# Altium PCB RF-learn-command-1relay-220V-capacitor.PcbDoc
Units mm, origin at the board's own origin, x right, y up, seen from the top; angles counter-clockwise.
Board outline 65 x 27.5 mm, 2 copper layers (Top Layer, Bottom Layer); 33 components, 27 nets, 95 pads, 24 vias.
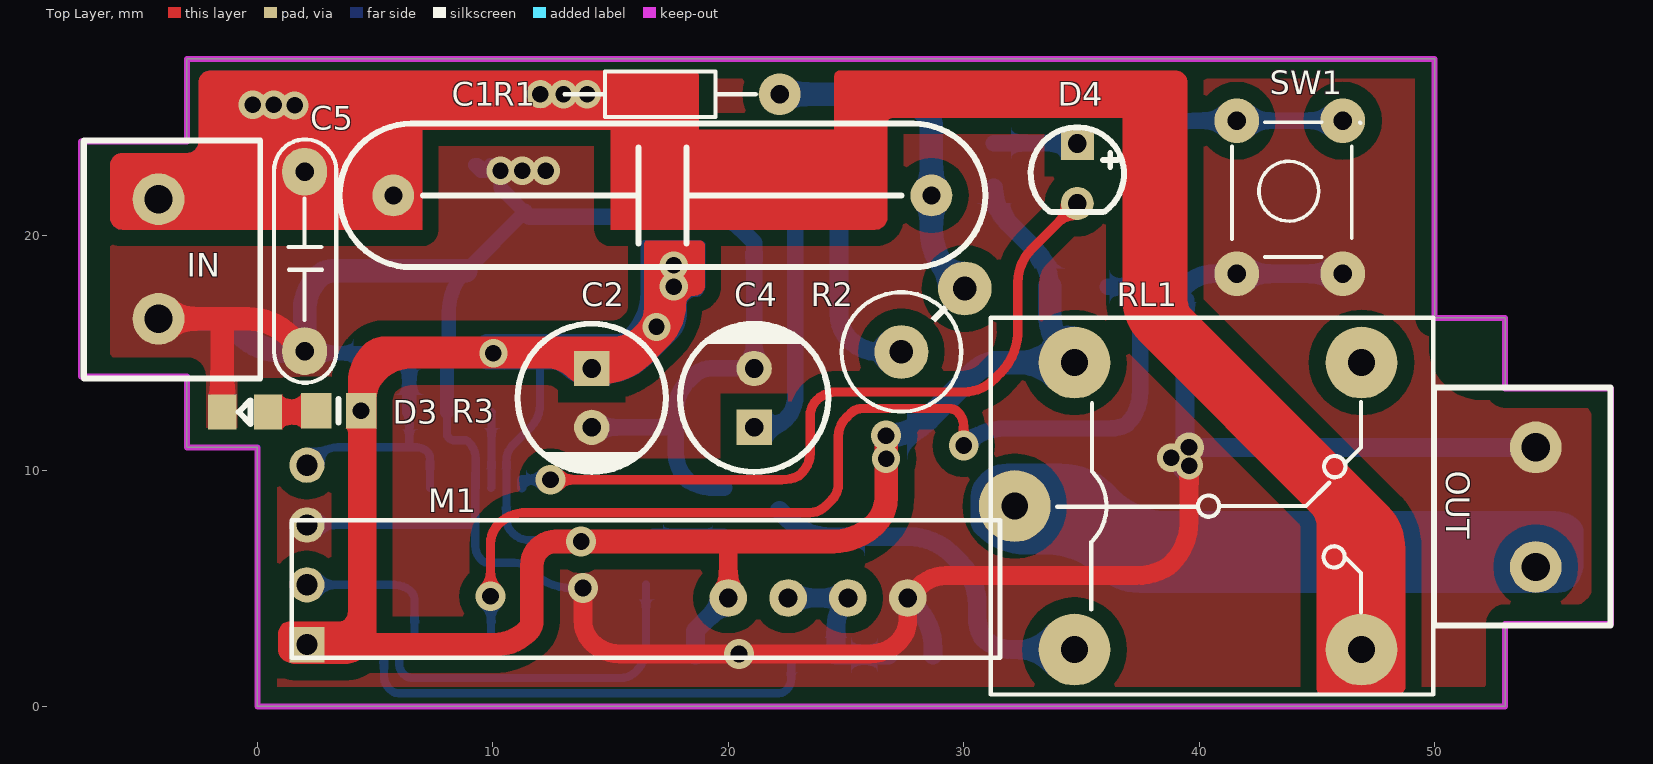
[diagram p0: Top Layer view]
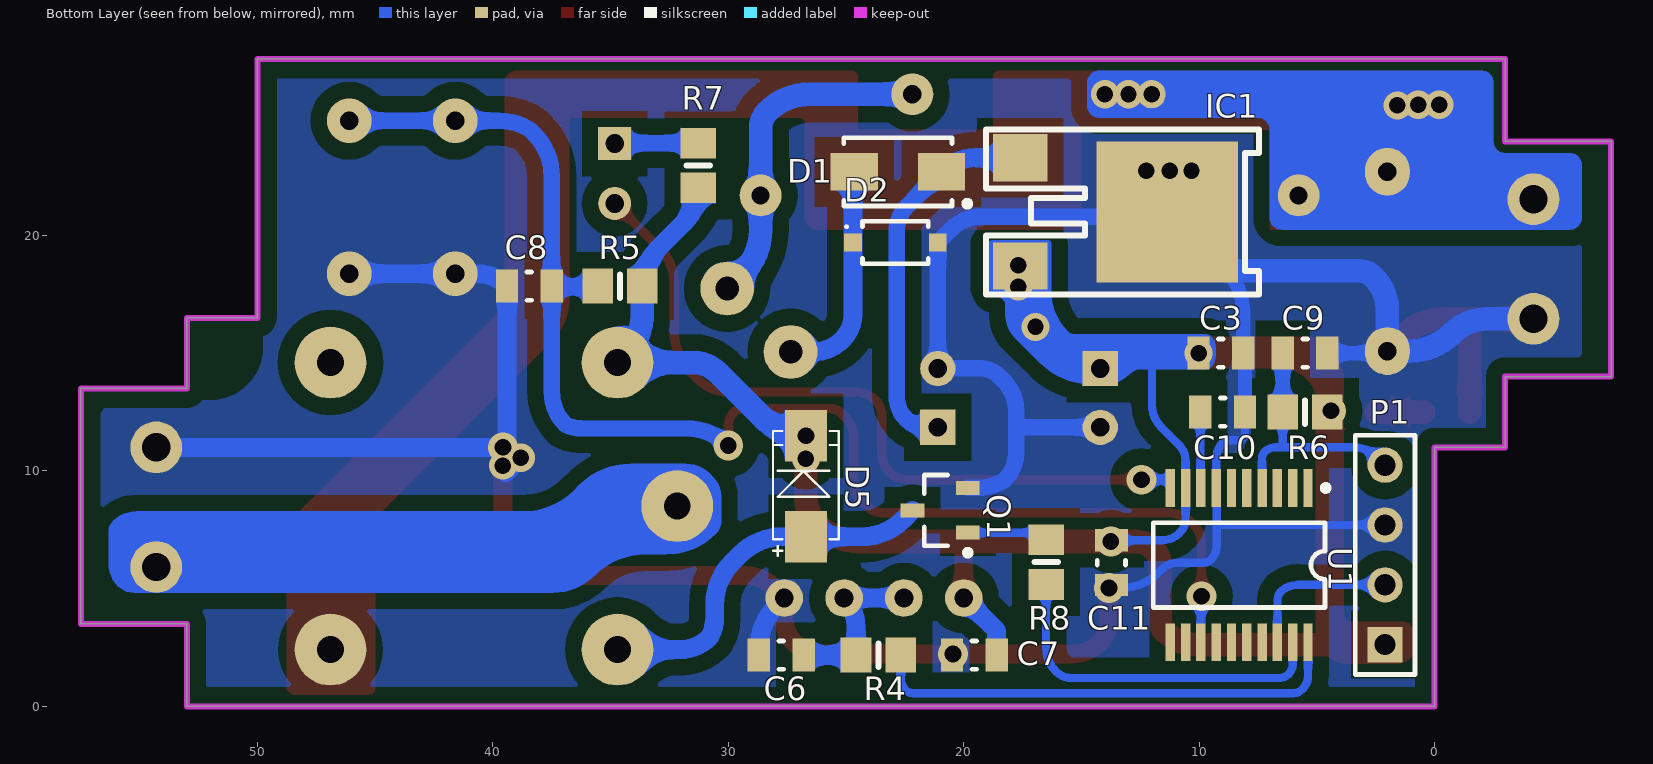
[diagram p1: Bottom Layer view, seen from below]
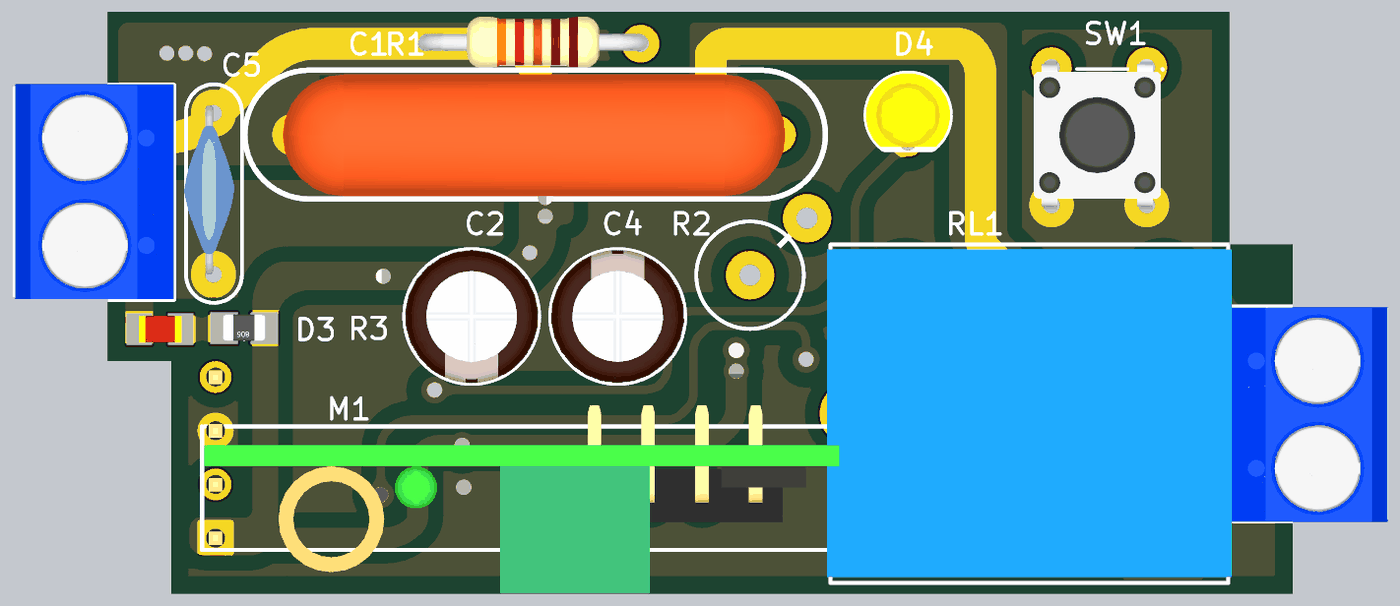
[diagram p2: 3D render of the assembled board from above, using the file's embedded part models]
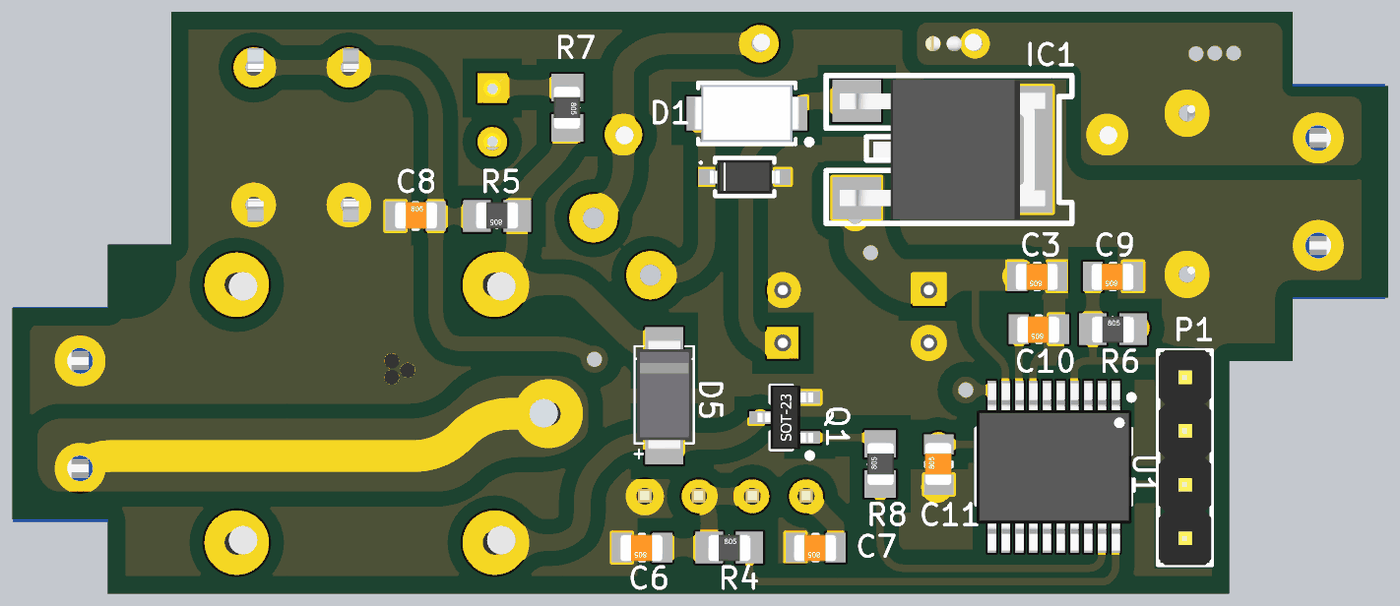
[diagram p3: 3D render of the assembled board from below, using the file's embedded part models]

## Layer stack, top to bottom
Top Solder: solder mask 0.0102, Solder Resist, Dk 3.5
Top Layer: signal copper 0.0356
Dielectric 1: dielectric 0.32, FR-4, Dk 4.8
Bottom Layer: signal copper 0.0356
Bottom Solder: solder mask 0.0102, Solder Resist, Dk 3.5

## Board outline
0,0 53,0 53,3.5 57.5,3.5 57.5,13.5 53,13.5 53,16.5 50,16.5 50,27.5 -3,27.5 -3,24 -7.5,24 -7.5,14 -3,14 -3,11 0,11 0,0

## Design rules (kind name [scope] priority, off if disabled: settings)
Clearance Clearance_1 [InPolygon] p1: gap=0.7
Clearance [All] p2: gap=0.254
PolygonConnect [All] p1: connectstyle=Direct reliefconductorwidth=0.254 reliefentries=4 polygonreliefangle="90 Angle" airgapwidth=0.254
RoomDefinition RF-learn-command-1relay-220V-capacitor [InComponentClass('RF-learn-command-1relay-220V-capacitor')] p1: confinementstyle=ConfineIn formatcopy=TRUE lockcomponents=FALSE outline 59,2 270.499,2 270.499,35.5 59,35.5
RoutingVias [All] p1: holewidth=0.7 width=1.2 viastyle="Through Hole" minholewidth=0.7 minwidth=1.2 maxholewidth=0.7 maxwidth=1.2
SolderMaskExpansion [All] p1: expansion=0.102
Width [All] p1: maxlimit=3 minlimit=0.254 preferedwidth=1
30 further rules are at their usual default settings.

## Components (designator, comment, footprint, x,y, rotation, side; value= is the part's Value field where it differs from the comment)
C1 "2.2uF" "CAP 400V POLY" 17.2,21.7 r0 top
C2 "47uF" "Capacitor 6.3" 14.2,13.1 r270 top
C3 "100nF" "CM 0805" 9.075,15 r0 bottom
C4 "47uF" "Capacitor 6.3" 21.1,13.1 r90 top
C5 "Cap1" C_Ceramic_KV 2,18.9 r90 top
C6 "33pF" "CM 0805" 27.75,2.175 r0 bottom
C7 "100n" "CM 0805" 19.55,2.175 r0 bottom
C8 "100nF" "CM 0805" 38.45,17.85 r180 bottom
C9 "100nF" "CM 0805" 5.5,15 r0 bottom
C10 "0.1uF" "CM 0805" 9,12.5 r0 bottom
C11 "100nF" "CM 0805" 13.725,6.102 r90 bottom
D1 "1N4007" DO-214AC 22.8,22.7 r0 bottom
D2 "Diode Zener" SOD-123 22.9,19.7 r180 bottom
D3 "RED LED" LED0805-R -0.5,12.5 r0 top
D4 "RED LED" LED3mm-Y 34.825,23.9 r270 top
D5 "SS14" "DO-214AC (SMA)" 27.2,8.1 r90 bottom
IC1 "LM7805" TO-252-3-L1 14.85,21 r270 bottom
IN "Terminal 2" "Terminal 2 5.08" -4.2,19 r270 top (schematic designator CON1)
M1 "RF_315_RX" Module-RF-RX 20,4.6 r0 top locked
OUT "Terminal 2" "Terminal 2 5.08" 54.3,8.46 r90 top (schematic designator CON2)
P1 "Header 4" HDR1X4 2.1,2.62 r90 bottom
Q1 "C1815" 2SC1815 21,8.325 r0 bottom
R1 "1k" "R 1/4W" 17.1,26 r0 top
R2 "47" "R 1WD" 28.7,16.4 r225 top
R3 "1K" R0805 3.45,12.55 r180 top
R4 "4.7k" R0805 23.625,2.175 r180 bottom
R5 "10K" R0805 34.6,17.85 r0 bottom
R6 "10k" R0805 5.5,12.5 r180 bottom
R7 "1K" R0805 31.275,22.975 r270 bottom
R8 "2.2k" R0805 16.5,6.125 r90 bottom
RL1 "Relay SPDT, 10A, 5V" RL_SPDT_10A 32.168,8.504 r0 top
SW1 "SW-4P-S" SW4 41.6,18.375 r90 top
U1 "STM8S003F3P6TR" SSOP-20 8.3,6 r0 bottom

## Footprints (in the part's own frame and the unit in brackets; to place one, negate y for a bottom-side part, rotate by r counter-clockwise, add the part's x,y. Pads: shape width x height; smd on the part's side, far side on the other; paste and mask are expansions set on the pad)
2SC1815 [mm] "2SC1815 SMD"
  rect 1x0.6 smd: 1(-1.175,0.95) 2(-1.175,-0.95) 3(1.175,0)
  silkscreen extent -1.3,-1.5 0.67,1.92, body extent -1.34,-1.5 1.3,1.5, height 1.08
C_Ceramic_KV [mil] "Ceramic capacitors"
  oval 80x75 hole 31: 1(-150,0) 2(150,0)
  silkscreen extent -203,-53 204,51, body extent -150,-39 165,55, height 356
"CAP 400V POLY" [mil]
  round 70 hole 30: 1(-450,0) 2(450,0)
  silkscreen extent -540,-120 540,120, body extent -470,-114 466,112, height 430
"Capacitor 6.3" [mm] "Pitch 2.5mm"
  rect 1.5x1.5 hole 0.8: 1(-1.25,0)
  round 1.5 hole 0.8: 2(1.25,0)
  silkscreen extent -3.15,-3.15 3.15,3.15, body extent -3.15,-3.15 3.15,3.15, height 11
"CM 0805" [mm]
  rect 0.95x1.4 smd: 1(-0.95,0) 2(0.95,0)
  silkscreen extent -0.1,-0.6 0.1,0.6, body extent -0.97,-0.6 1.03,0.65, height 0.78
DO-214AC [mm] "SODFL, 2-Leads, Body 2.69x5.03mm, IPC Medium Density"
  rect 2x1.6 smd: 1(-1.85,0) 2(1.85,0)
  silkscreen extent -3.07,-1.45 2.3,1.47, body extent -2.5,-1.35 2.5,1.35, height 2.15
"DO-214AC (SMA)" [mm]
  rect 2.2x1.8 smd: 1(-0.899,-0.5) 2(3.397,-0.5)
  silkscreen extent -1.7,-1.9 3.6,0.9, body extent -1.3,-1.8 3.9,0.8, height 2.3
HDR1X4 [mm] "Connector; Header; 4 Position"
  rect 1.5x1.5 hole 0.9: 1(0,0)
  round 1.5 hole 0.9: 2(2.54,0) 3(5.08,0) 4(7.62,0)
  silkscreen extent -1.27,-1.27 8.89,1.27, body extent -1.28,-1.25 8.88,1.24, height 8.54
LED3mm-Y [mm]
  rect 1.4x1.4 hole 0.8: 1(0,0)
  round 1.4 hole 0.8: 2(2.54,0)
  silkscreen extent -0.7,-1.98 2.9,1.98, body extent -0.7,-2 2.78,1.99, height 5.2
LED0805-R [mm] "Chip Diode; Body 2.0 x 1.3 mm (LxW typ)"
  rect 1.2x1.5 smd: 1(0.95,0) 2(-1,0)
  silkscreen extent -0.3,-0.5 0.2,0.5, body extent -1.03,-0.64 1,0.64, height 1.1
Module-RF-RX [mm] "Module_RF_T"
  round 1.6 hole 0.8: 1(0,0) 2(2.54,0) 3(5.08,0) 4(7.62,0)
  silkscreen extent -18.54,-2.54 11.54,3.3, body extent -18.43,-4.59 11.57,4.29, height 17.5
R0805 [mm] "Chip Resistor; Body 2.0 x 1.2 mm (LxW typ)"
  rect 1.3x1.5 smd: 1(0.95,0) 2(-0.95,0)
  silkscreen extent 0,-0.5 0,0.5, body extent -1,-0.65 1,0.6, height 0.78
"R 1/4W" [mm] "R 1/4W, 2 Pin, 350mil"
  round 1.2 hole 0.7: 1(-5.08,0)
  round 1.778 hole 0.787: 2(5.08,0)
  silkscreen extent -4.06,-0.97 4.06,0.97, body extent -5.4,-1.13 5.4,1.27, height 2.83
"R 1WD" [mil] "R 1W, 2 pin, 500mil"
  round 90 hole 39.37: 1(-75,0) 2(75,0)
  silkscreen extent -30,-100 175,100
RL_SPDT_10A [mil] "Relay SPDT, 5 pin, 10A,W 650mil, L 800mil, H 800mil"
  round 120 hole 45: 1(0,0) 2(580,240) 3(580,-240) 4(100,-240) 5(100,240)
  silkscreen extent -40,-315 700,315, body extent -46,-304 706,306, height 602
SOD-123 [mm]
  rect 0.75x0.75 smd: 1(-1.8,0) 2(1.8,0)
  silkscreen extent -2.12,-0.9 1.4,0.9, body extent -1.65,-0.8 1.65,0.8, height 1.2
SSOP-20 [mm] "SSOP, Plastic; 20 Leads; Body Width 5.3 mm; Pitch 0.65 mm"
  rect 0.4x1.6 smd: 1(-2.925,-3.275) 2(-2.275,-3.275) 3(-1.625,-3.275) 4(-0.975,-3.275) 5(-0.325,-3.275) 6(0.325,-3.275) 7(0.975,-3.275) 8(1.625,-3.275) 9(2.275,-3.275) 10(2.925,-3.275) 11(2.925,3.275) 12(2.275,3.275) 13(1.625,3.275) 14(0.975,3.275) 15(0.325,3.275) 16(-0.325,3.275) 17(-0.975,3.275) 18(-1.625,3.275) 19(-2.275,3.275) 20(-2.925,3.275)
  silkscreen extent -3.8,-3.4 3.65,1.8, body extent -3.68,-3.94 3.65,3.96, height 1.98
SW4 [mm] "SW button 4pin, 250 x250 mil"
  round 1.905 hole 0.787: 1(0,0) 2(6.5,-4.5) 3(6.5,0) 4(0,-4.5)
  silkscreen extent 0.71,-5.26 6.43,0.2, body extent -0.8,-5.16 7.41,0.84, height 9.5
"Terminal 2 5.08" [mm] "Terminal block 5.08mm 2 ways"
  round 2.2 hole 1.2: 1(-2.54,0) 2(2.54,0)
  silkscreen extent -5.02,-3.18 5.08,4.32, body extent -5.08,-3.17 5.08,4.33, height 10
TO-252-3-L1 [mm]
  rect 2x2.3 smd: 1(-2.3,-2.75) 3(2.3,-2.75)
  rect 6x6 smd: 2(0,3.5)
  silkscreen extent -3.5,-4.2 3.5,7.4, body extent -3.28,-3.55 3.3,6.15, height 2.3

## Part data
C1: library part "CAP Polyester", "DIP Electrolytic Capacitors"
C2 C4: library part "CAP DIP", "DIP Electrolytic Capacitors"
C3 C8 C9 C10 C11: library part "CM Ceramic", "SMD Ceramic  Capacitor"
C5: "Polar Capacitor"
C6 C7: library part "Cap Semi", "Capacitor 100n 16V 0603"
D1: library part "Diodes Rectifier", "1N4007 Rectifier Diodes"
D2: "Zener Voltage Regulators"
D3 D4: library part LED2, "LED SUPR RED CLR 0805 RT ANG SMD"
D5: library part Diode, "DIODE GEN PURPOSE 1000V 1A SMA"
IC1: library part LM78xx, "On ap +, from + 5 to + 24VDC"
M1: library part ModuleRF-RX
P1: "Header, 4-Pin"
Q1: "NPN SMD Transistor"
R1: library part R1/4W, "Resistor 1/4W DIP"
R2: library part R1/2W, "Resistor 1/2W DIP"
R3 R5 R7: library part Res3, "Resistor 10k 0603"
R4 R6 R8: library part Res3, "Resistor"
RL1: library part "Relay 1", "Relay SPDT,10A - 12VDC 5 Pin"
SW1: library part SW-4PIN-SMALL, "Switch Small 4 Pin"
U1: library part STM8S003F3, "MCU"

## Via types
v1: diameter 1.2, hole 0.7, Top Layer to Bottom Layer, tented both sides, 8 vias
v2: diameter 1.2, hole 0.7, Top Layer to Bottom Layer, tented top, 7 vias
v3: diameter 1.27, hole 0.711, Top Layer to Bottom Layer, tented both sides, 5 vias
v4: diameter 1.27, hole 0.711, Top Layer to Bottom Layer, tented top, 4 vias

## Nets (pads, with @x,y where several pads share a name; then routed paths per layer and width w, separated by ;. In a path a pad name is that pad's centre, name@x,y a point inside that pad or via, vN(x,y) a via of type N, cw(c..) or ccw(c..) an arc to the next point about the centre after c; other vN are vias at no path point)
5V: C2.1 C3.2 C7.1 C11.2 D5.2 IC1.3 M1.1 P1.1 R3.2 R5.2 R6.1 R7.1 RL1.5 U1.9 | length 95.2
  Top Layer w0.8: M1.1 20,7
  Top Layer w1: P1.1 3.686,2.62 ; v2(10.025,15) 5.604,15 ccw(c5.604,14.146) 5,14.75 ccw(c6.448,13.302) 4.4,13.302 v4(4.4,12.55) 4.4,3.716 cw(c3.034,3.716) 4,2.75 cw(c3.686,3.064) 3.686,2.62 ; v1@16.775,16.075 ccw(c16.775,16.196) 16.86,16.11 16.925,16.175 cw(c16.865,16.115) v1(16.95,16.115) v1@16.95,15.9 ; 17.375,17.1 ccw(c16.643,17.832) v2(17.678,17.832) v2(17.678,18.728) cw(c17.55,18.856) v2@17.55,18.675 ; v4(26.7,11.497) v2(26.7,10.515) 26.7,8.846 cw(c25.142,8.846) 26.244,7.744 cw(c24.448,9.54) 24.448,7 20,7 v4(13.75,7) 12.674,7 ccw(c12.674,5.976) 11.95,6.7 ccw(c12.674,5.976) 11.65,5.976 11.65,3.622 cw(c11.053,3.622) 11.475,3.2 cw(c10.075,4.6) 10.075,2.62 3.686,2.62
  Bottom Layer w0.35: 11.976,15 cw(c11.917,14.941) 12,14.941 12,12.8 cw(c10.672,12.8) 11.611,11.861 10.85,11.1 ccw(c11.514,10.436) 10.575,10.436 U1.9 10.575,7.961 ccw(c11.386,7.961) 10.813,7.388 10.847,7.353 ccw(c11.575,8.082) 11.575,7.052 C11.2
  Bottom Layer w0.8: C7.1 18.6,3.2 M1.1 ; R7.1 ccw(c33.387,22.025) 31.893,20.532 ; 31.894,20.531 32.996,19.429 cw(c31.417,17.85) R5.2
  Bottom Layer w1: v2(10.025,15) 11.976,15 12.631,15 cw(c12.631,12.781) C2.1 14.548,14.35 ccw(c14.548,16.89) 16.344,15.094 16.756,15.506 ccw(c14.96,17.302) v2@17.5,17.302 ; v4(26.7,11.497) 26.72,11.497 ccw(c26.72,14.037) 28.516,12.241 30.451,14.176 cw(c31.476,13.149) 31.476,14.6 RL1.5 34.394,14.914 cw(c36.19,16.71) 33.65,16.71 R5.2
BUTTON: U1.17
BUZZER: U1.1
DATA: R4.1 U1.20 | length 20.3
  Bottom Layer w0.35: U1.20 5.375,1.271 ccw(c6.09,1.271) 5.584,0.766 5.648,0.702 ; 5.648,0.702 ccw(c6,1.053) 6,0.556 22.127,0.556 ccw(c22.127,1.048) 22.475,0.7 ccw(c21.992,1.183) 22.675,1.183 R4.1@22.675,1.95
GND: C2.2 C3.1 C4.2 C5.1 C6.2 C7.2 C8.1 C9.1 C10.1 C11.1 D2.2 D3.2 IC1.2 IN.2 M1.4 OUT.2 P1.3 Q1.2 SW1.1 SW1.4 U1.7 | length 160.4
  Top Layer w0.8: v4(13.825,5.025) 13.825,3.631 ccw(c15.112,3.631) 14.202,2.72 ccw(c15.398,3.917) 15.398,2.225 v3(20.45,2.225) 26,2.225 ccw(c26,3.975) 27.237,2.737 ; 27.238,2.738 ccw(c26.315,3.661) 27.62,3.661 M1.4 28.089,5.069 cw(c29.25,3.908) 29.25,5.55 37.323,5.55 ccw(c37.323,8.09) 38.755,5.992 38.831,6.068 ccw(c37.035,7.864) 39.575,7.864 v1(39.575,10.227)
  Top Layer w1: IN.2 -1.5,16.46 ; D3.2 -1.5,16.46 ; C5.1 1.374,15.716 ccw(c-0.422,13.92) -0.422,16.46 -1.5,16.46
  Bottom Layer w0.35: P1.3 9.254,7.7 ; C10.1 8.05,11.581 ccw(c8.306,11.581) 8.125,11.4 ccw(c8.366,11.641) 8.366,11.3 8.794,11.3 cw(c8.794,11.044) 8.975,11.225 cw(c8.251,10.501) 9.275,10.501 9.275,10.476 ; U1.7 U1.7@9.275,9.612 ; 9.275,10.475 U1.7@9.275,9.612 ; v4(13.825,5.025) 13.33,5.025 cw(c13.33,7.33) 11.7,5.7 11.575,5.825 ccw(c10.911,5.161) 10.911,6.1 9.802,6.1 cw(c9.802,6.527) 9.5,6.225 cw(c10.094,6.819) 9.254,6.819 9.254,7.7 ; 9.254,7.7 9.254,9.89 cw(c7.423,9.612) U1.7@9.275,9.612
  Bottom Layer w0.6: C5.1@2.09,15 C9.1 ; C10.1 C3.1@8.05,15 ; C3.1 8.125,16.723 cw(c10.665,16.723) 8.85,18.5 cw(c10.665,16.723) 8.869,18.519 IC1.2 10.323,22.027 v2(10.323,22.75) ; v2(12.25,22.75) v2(11.25,22.75) IC1.2@10.5,22.75 ; IC1.2@9.6,22.75 IC1.2@10.146,22.75 ; IC1.2@9.6,22.75 9.421,22.929 ccw(c9.25,22.759) 9.25,23 9.5,22.75 IC1.2@9.6,22.75 ; IC1.2@10.146,22.75 9.896,23 cw(c9.896,22.146) IC1.2@10.5,22.75 ; IC1.2@10.146,22.75 v2(10.323,22.75) ; v2(10.323,22.75) IC1.2@10.5,22.75
  Bottom Layer w0.7: IC1.2 11.55,20.8 19.25,20.8 cw(c19.25,18.989) 20.53,20.27 D2.2 C4.2 19.25,14.35 ccw(c19.25,13.324) 18.524,14.049 18.288,13.813 ccw(c19.525,12.575) 17.775,12.575 17.775,11.85 ; C2.2 17.775,11.85 ; Q1.2 19.465,9.275 cw(c19.465,11.665) 18.295,9.581 18.234,9.642 cw(c19.342,10.75) 17.775,10.75 17.775,11.85
  Bottom Layer w0.8: M1.4 27.956,4.264 cw(c26.16,2.468) 28.7,2.468 C6.2 ; v1@38.65,10.625 cw(c38.65,10.384) v1(38.821,10.554) 38.975,10.4 39.45,9.925 ccw(c39.148,10.227) v1(39.575,10.227) v3(39.575,11) ; C8.1@39.4,17.25 39.4,11.175 v3(39.575,11) ; C8.1 cw(c40.667,16.583) 40.667,18.375 SW1.1 SW1.4 ; OUT.2 v3(39.575,11)
  Bottom Layer w1: IN.2 -2.245,16.46 cw(c-2.245,14.324) -0.737,15.837 cw(c-2.245,14.324) -0.734,15.834 ccw(c1.062,17.63) 1.062,15.09 C5.1 2,16.799 cw(c4.048,16.799) 2.6,18.247 cw(c3.21,17.638) 3.21,18.5 IC1.2@8.85,18.5
LEARN: C8.2 R5.1 SW1.2 SW1.3 U1.13 | length 59.2
  Top Layer w0.4: v3@9.9,4.325 v3(9.9,4.675) 9.9,6.905 cw(c11.095,6.905) 10.25,7.75 cw(c11.397,6.603) 11.243,8.218 cw(c11.397,6.603) 11.397,8.225 23.461,8.225 ccw(c23.461,9.164) 24.125,8.5 24.4,8.775 ccw(c23.736,9.439) 24.675,9.439 24.675,11.465 cw(c25.785,11.465) 25,12.25 25.2,12.45 ; 25.2,12.45 cw(c25.683,11.967) 25.683,12.65 29.388,12.65 cw(c29.388,12.138) 29.75,12.5 cw(c29.146,11.896) 30,11.896 v3(30,11.075)
  Bottom Layer w0.35: v3(9.9,4.675) 9.925,4.65 U1.13
  Bottom Layer w0.7: v3(30,11.075) cw(c31.75,9.325) 31.75,11.8 36.183,11.8 ccw(c36.183,13.592) 36.415,11.815 ccw(c36.183,13.592) 36.912,11.955 ccw(c35.491,13.375) 37.5,13.375 37.5,17.825 R5.1@36.125,17.825 ; C8.2 37.5,22.512 cw(c40.04,22.512) 38.244,24.308 38.455,24.519 cw(c39.752,22.335) 39.752,24.875 SW1.3 SW1.2
NetC1_1: C1.1 C5.2 IN.1 R1.1 RL1.3 | length 82.5
  Top Layer w1: R1.1 v1(13,26) v1(14,26) 15.75,26 19,22.75 23.75,22.75 27.3,26.3 36.45,26.3 38.125,24.625 38.125,17.075 46.9,8.3 RL1.3
  Bottom Layer w1: IN.1 -1.71,21.54 -0.54,22.71 C5.2 ; v1(-0.2,25.55) v1(0.69,25.55) cw(c0.69,25.465) 0.75,25.525 v1(1.578,25.525) cw(c1.578,24.928) v1@2,25.35 ; C1.1 3.01,21.7 C5.2 ; v1(13,26) R1.1 2.65,26 v1@2,25.35 ; C5.2 v1@2,25.35
NetC1_2: C1.2 R1.2 R2.1 | length 14.4
  Bottom Layer w1: R1.2 26.548,26 cw(c26.548,23.46) 28.344,25.256 cw(c27.653,24.565) 28.63,24.565 C1.2 28.63,20.216 ccw(c31.17,20.216) 29.374,18.42 R2.1
NetC4_1: C4.1 D1.1 IC1.1 | length 16.3
  Bottom Layer w0.7: D1.1 22.39,21.26 ; C4.1 21.633,11.85 ccw(c21.633,12.978) 22.429,12.179 ccw(c21.633,12.978) 22.43,12.18 ccw(c21.417,13.194) 22.85,13.194 22.85,20.15 ccw(c21.281,20.15) 22.391,21.259
  Bottom Layer w0.8: IC1.1 19.501,23.3 cw(c19.501,21.251) D1.1
NetC6_1: C6.1 M1.2 M1.3 R4.2 | length 7.3
  Bottom Layer w0.8: M1.2 M1.3 ccw(c26.299,3.381) 24.575,3.381 R4.2 C6.1
NetC10_2: C10.2 U1.8 | length 3.2
  Bottom Layer w0.35: U1.8 9.946,9.296 9.946,12.496 C10.2
NetCON2_1: OUT.1 RL1.1 | length 23
  Bottom Layer w2: RL1.1 33.869,8.504 cw(c33.869,5.964) 35.665,7.76 36.761,6.664 ccw(c38.557,8.46) 38.557,5.92 OUT.1
NetD1_2: D1.2 D2.1 R2.2 | length 9.6
  Bottom Layer w0.8: D1.2@24.7,22.65 D2.1 24.7,16.661 ccw(c26.236,16.661) 25.15,15.575 ccw(c26.41,16.835) 26.41,15.053 R2.2
  Bottom Layer w1: D1.2 D1.2@24.7,22.65
NetD3_1: D3.1 R3.1 | length 2
  Top Layer w1: D3.1 R3.1@2.5,12.5
NetD4_1: D4.1 R7.2 | length 3.6
  Bottom Layer w0.7: R7.2 34.8,23.925 D4.1
NetD5_1: D5.1 Q1.3 RL1.4 | length 15.8
  Bottom Layer w0.8: Q1.3 22.555,7.945 ccw(c24.351,9.741) 24.351,7.201 D5.1 27.697,7.201 cw(c27.697,4.661) 29.493,6.457 29.831,6.119 cw(c28.035,4.323) 30.575,4.323 30.575,3.792 ccw(c32.367,3.792) 30.794,2.933 ccw(c32.062,4.201) 32.062,2.408 RL1.4
NetQ1_1: Q1.1 R8.1 | length 3.4
  Bottom Layer w0.35: R8.1 16.8,7.375 Q1.1
NRST: C9.2 P1.4 R6.2 U1.4 | length 11
  Bottom Layer w0.35: P1.4 P1.4@2.46,10.6 ; P1.4@2.461,10.601 cw(c3.425,9.636) 3.425,11 6.425,11 ; R6.2 6.45,11.025 6.425,11 ; U1.4 7.325,10.551 ccw(c6.965,10.551) 7.219,10.806 ccw(c6.75,10.336) 6.75,11 6.425,11
  Bottom Layer w0.6: R6.2 C9.2
OSC_IN: U1.5
OSC_OUT: U1.6
RELAY: R8.2 U1.19 | length 15.7
  Bottom Layer w0.35: U1.19 6.025,1.789 ccw(c6.614,1.789) 6.026,1.756 ccw(c6.614,1.789) 6.198,1.372 ; R8.2 16.5,2.501 cw(c15.049,2.501) 16.075,1.475 cw(c15.411,2.139) 15.411,1.2 6.613,1.2 ; 6.198,1.372 ccw(c6.613,1.787) 6.223,1.348 ; 6.198,1.372 ccw(c6.613,1.787) 6.223,1.348 ; 6.223,1.348 ccw(c6.613,1.787) 6.613,1.2 ; 6.223,1.348 ccw(c6.613,1.787) 6.613,1.2
RX: U1.3
SCL: U1.12
SDA: U1.11
STATUS: D4.2 U1.10 | length 32.1
  Top Layer w0.4: v3(12.45,9.625) 22.268,9.625 ccw(c22.268,11.332) 22.985,9.783 23.138,9.936 ccw(c22.323,10.75) 23.475,10.75 23.475,12.336 cw(c24.414,12.336) 23.75,13 cw(c24.595,12.155) 24.595,13.35 30,13.35 ccw(c30,15.165) 31.284,13.882 31.556,14.154 ccw(c29.76,15.95) 32.275,15.595 ccw(c29.76,15.95) 32.3,15.95 32.3,18 cw(c34.316,18) 32.89,19.425 ; 32.89,19.425 D4.2
  Bottom Layer w0.4: U1.10@11.229,9.275 11.229,9.625 v3(12.45,9.625)
SWIM: P1.2 U1.18 | length 6.7
  Bottom Layer w0.35: P1.2 5.756,5.16 cw(c5.756,3.931) 5.87,5.155 cw(c5.756,3.931) 6.493,4.915 cw(c6.052,4.474) 6.625,4.719 cw(c6.052,4.474) 6.675,4.474 U1.18
TX: U1.2
pads on no net: RL1.2 U1.14 U1.15 U1.16

## Polygon pours and split planes (outlines as drawn)
GND on Top Layer "TOP-GND" (solid, pour order 0): -6.25,23.75 -3,23.75 ccw(c-3,24) -2.75,24 -2.75,27 cw(c-2.5,27) -2.5,27.25 49.25,27.25 cw(c49.25,26.75) 49.75,26.75 49.75,15.25 ccw(c52,15.25) 52,13 55.5,13 55.75,13 cw(c55.75,12) 56.75,12 56.75,5.25 cw(c55.75,5.25) 55.75,4.25 53,4.25 ccw(c53,3.5) 52.25,3.5 52.25,1.25 cw(c51.5,1.25) 51.5,0.5 45.25,0.5 1.25,0.5 cw(c1.25,1.25) 0.5,1.25 0.5,10.75 ccw(c0,10.75) 0,11.25 -2.25,11.25 cw(c-2.25,11.75) -2.75,11.75 -2.75,14 ccw(c-3.25,14) -3.25,14.5 -5.75,14.5 cw(c-5.75,15) -6.25,15
GND on Bottom Layer "BOT-GND" (solid, pour order 2): -6.25,23.75 -3,23.75 ccw(c-3,24) -2.75,24 -2.75,27 cw(c-2.5,27) -2.5,27.25 49.25,27.25 cw(c49.25,26.75) 49.75,26.75 49.75,15.25 ccw(c52,15.25) 52,13 55.5,13 55.75,13 cw(c55.75,12) 56.75,12 56.75,5.25 cw(c55.75,5.25) 55.75,4.25 53,4.25 ccw(c53,3.5) 52.25,3.5 52.25,1.25 cw(c51.5,1.25) 51.5,0.5 45.25,0.5 1.25,0.5 cw(c1.25,1.25) 0.5,1.25 0.5,10.75 ccw(c0,10.75) 0,11.25 -2.25,11.25 cw(c-2.25,11.75) -2.75,11.75 -2.75,14 ccw(c-3.25,14) -3.25,14.5 -5.75,14.5 cw(c-5.75,15) -6.25,15

## Keep-outs
Keep-Out Layer:
  the board outline again, w0.254

## Other copper
Top Layer:
  region net NetC1_1: 24.75,27 39,27 cw(c39,26.5) 39.5,26.5 39.5,25.255 39.5,25 27,25 ccw(c27,24.75) 26.75,24.75 26.75,24.5 24.5,24.5 24.5,26.75 cw(c24.75,26.75)
  region net NetC1_1: 26.25,20.25 ccw(c26.25,20.75) 26.75,20.75 26.75,24.5 15,24.5 15,20.25
  region net NetC1_1: -5.75,23.5 -3,23.5 ccw(c-3,24) -2.5,24 -2.5,26.5 cw(c-2,26.5) -2,27 18.5,27 cw(c18.5,26.75) 18.75,26.75 18.75,24.5 7,24.5 7,20.25 -5.75,20.25 cw(c-5.75,20.75) -6.25,20.75 -6.25,23 cw(c-5.75,23)
  region net NetC1_1: 39.5,25 39.5,17.25 ccw(c40.103,17.25) 39.677,16.823 48.006,8.494 cw(c46.211,6.698) 48.75,6.698 48.75,0.75 cw(c48.324,0.926) 48.5,0.5 45.25,0.5 cw(c45.25,0.75) 45,0.75 45,7.646 ccw(c44.147,7.647) 44.75,8.25 37.494,15.506 cw(c39.29,17.302) 36.75,17.302 36.75,25
  region net 5V: 0.875,2.412 0.875,3.053 cw(c1.472,3.053) 1.05,3.475 cw(c1.352,3.173) 1.352,3.6 3.519,3.6 ccw(c3.519,3.856) 3.7,3.675 ccw(c3.338,4.037) 3.85,4.037 3.85,13.756 cw(c6.069,13.756) 4.5,15.325 cw(c5.405,14.42) 5.405,15.7 15.13,15.7 ccw(c15.13,16.895) 15.975,16.05 16.141,16.216 ccw(c15.457,16.901) 16.425,16.901 16.425,19.594 cw(c16.681,19.594) 16.5,19.775 18.8,19.775 cw(c18.8,19.575) 19,19.575 19,17.875 cw(c18.575,17.875) 18.575,17.45 ccw(c18.575,17.075) 18.2,17.075 cw(c15.786,17.075) 17.493,15.368 16.698,14.573 cw(c14.53,16.741) 14.53,13.675 13.96,13.675 cw(c13.96,14.785) 13.175,14 ccw(c12.33,13.155) 12.33,14.35 6.547,14.35 ccw(c6.547,12.728) 5.4,13.875 ccw(c6.245,13.03) 5.05,13.03 5.05,3.261 cw(c3.514,3.261) 4.6,2.175 cw(c3.695,3.08) 3.695,1.8 1.629,1.8 cw(c1.629,2.654) 1.025,2.05 cw(c1.387,2.412)
Bottom Layer:
  region net NetC1_1: -5.75,23.5 -3,23.5 ccw(c-3,24) -2.5,24 -2.5,26.5 cw(c-2,26.5) -2,27 14.25,27 cw(c14.25,26.5) 14.75,26.5 14.75,25.5 cw(c14.25,25.5) 14.25,25 7.5,25 ccw(c7.5,24.5) 7,24.5 7,20.75 cw(c6.5,20.75) 6.5,20.25 -5.75,20.25 cw(c-5.75,20.75) -6.25,20.75 -6.25,23 cw(c-5.75,23)
  region net NetCON2_1: 30.525,7.325 ccw(c32.637,9.437) 32.637,6.45 33.505,6.45 cw(c33.505,3.384) 35.673,5.552 ccw(c37.428,7.307) 37.428,4.825 55.261,4.825 ccw(c55.261,5.764) 55.925,5.1 ccw(c54.959,6.066) 56.325,6.066 56.325,7.392 ccw(c55.642,7.392) 56.125,7.875 ccw(c55.159,6.909) 55.159,8.275 38.72,8.275 cw(c38.72,11.341) 36.552,9.173 36.323,9.402 ccw(c34.155,7.234) 34.155,10.3 31.801,10.3 ccw(c31.801,8.849) 30.775,9.875 30.65,9.75 ccw(c31.495,8.905) 30.3,8.905 30.3,7.868 ccw(c31.068,7.868)
  region net 5V: 9.681,14.325 12.432,14.325 cw(c12.432,13.557) 12.975,14.1 ccw(c14.001,15.126) 14.001,13.675 14.58,13.675 ccw(c14.58,16.741) 16.748,14.573 17.825,15.65 ccw(c16.859,16.616) 18.225,16.616 18.225,17.034 cw(c18.566,17.034) 18.325,17.275 cw(c18.627,16.973) 18.627,17.4 18.669,17.4 ccw(c18.669,17.656) 18.85,17.475 ccw(c18.428,17.897) 19.025,17.897 19.025,19.64 ccw(c18.94,19.64) 19,19.7 ccw(c18.759,19.459) 18.759,19.8 16.446,19.8 ccw(c16.446,19.629) 16.325,19.75 ccw(c16.446,19.629) 16.275,19.629 16.275,17.58 cw(c13.97,17.58) 15.6,15.95 cw(c15.238,16.312) 15.238,15.8 9.716,15.8 ccw(c9.716,15.459) 9.475,15.7 ccw(c9.897,15.278) 9.3,15.278 9.3,14.883 ccw(c9.983,14.883) 9.5,14.4 ccw(c9.681,14.581)

## Silkscreen, mask and mechanical layers (free items; w line width, h text height)
Top Solder:
  lines w1.5: -4.2,21.54 -0.23,21.54 ccw(c-0.23,24.606) 1.938,22.438 4.602,25.102 cw(c6.77,22.934) 6.77,26 15.543,26 cw(c15.543,24.293) 16.75,25.5 cw(c15.543,24.293) 17.25,24.293 17.25,23.457 ccw(c18.957,23.457) 17.75,22.25 24.043,22.25 ccw(c24.043,23.957) 25.25,22.75 ccw(c24.646,23.354) 25.5,23.354 25.5,25.5 25.823,25.823 cw(c26.25,25.396) 26.25,26 37.146,26 cw(c37.146,25.146) 37.75,25.75 cw(c36.543,24.543) 38.25,24.543 38.25,16.854 ccw(c39.104,16.854) 38.5,16.25 46.102,8.648 cw(c43.934,6.48) 47,6.48 47,2.649 cw(c46.659,2.649) 46.9,2.408
Bottom Solder:
  lines w1.5: 32.168,8.504 33.976,8.504 cw(c33.976,5.438) 36.144,7.606 36.352,7.398 ccw(c38.52,9.566) 38.52,6.5 52.9,6.5 cw(c52.9,4.52) 54.3,5.92
Mechanical 13:
  lines w0.1: 0.875,2.412 ccw(c1.387,2.412) 1.025,2.05 ccw(c1.629,2.654) 1.629,1.8 3.695,1.8 ccw(c3.695,3.08) 4.6,2.175 ccw(c3.514,3.261) 5.05,3.261 5.05,13.03 cw(c6.245,13.03) 5.4,13.875 cw(c6.547,12.728) 6.547,14.35 12.33,14.35 cw(c12.33,13.155) 13.175,14 ccw(c13.96,14.785) 13.96,13.675 14.53,13.675 ccw(c14.53,16.741) 16.698,14.573 17.493,15.368 ccw(c15.786,17.075) 18.2,17.075 cw(c18.575,17.075) 18.575,17.45 ccw(c18.575,17.875) 19,17.875 19,19.575 ccw(c18.8,19.575) 18.8,19.775 16.5,19.775 ccw(c16.681,19.594) 16.425,19.594 16.425,16.901 cw(c15.457,16.901) 16.141,16.216 15.975,16.05 cw(c15.13,16.895) 15.13,15.7 13.29,15.7 5.405,15.7 ccw(c5.405,14.42) 4.5,15.325 ccw(c6.069,13.756) 3.85,13.756 3.85,4.037 cw(c3.338,4.037) 3.7,3.675 cw(c3.519,3.856) 3.519,3.6 1.352,3.6 ccw(c1.352,3.173) 1.05,3.475 ccw(c1.472,3.053) 0.875,3.053 0.875,2.412
  lines w0.254: 30.3,7.868 ccw(c31.068,7.868) 30.525,7.325 ccw(c32.637,9.437) 32.637,6.45 33.505,6.45 cw(c33.505,3.384) 35.673,5.552 ccw(c37.428,7.307) 37.428,4.825 38.12,4.825 54.41,4.825 54.962,4.825 55.261,4.825 ccw(c55.261,5.764) 55.925,5.1 ccw(c54.959,6.066) 56.325,6.066 56.325,6.65 56.325,7.109 56.325,7.392 ccw(c55.642,7.392) 56.125,7.875 ccw(c55.159,6.909) 55.159,8.275 54.15,8.275 38.72,8.275 cw(c38.72,11.341) 36.552,9.173 36.323,9.402 ccw(c34.155,7.234) 34.155,10.3 32.4,10.3 31.801,10.3 ccw(c31.801,8.849) 30.775,9.875 30.65,9.75 ccw(c31.495,8.905) 30.3,8.905 30.3,7.868
Mechanical 15:
  lines w0.1: 9.3,14.883 ccw(c9.983,14.883) 9.5,14.4 ccw(c9.681,14.581) 9.681,14.325 12.432,14.325 cw(c12.432,13.557) 12.975,14.1 ccw(c14.001,15.126) 14.001,13.675 14.58,13.675 ccw(c14.58,16.741) 16.748,14.573 17.825,15.65 ccw(c16.859,16.616) 18.225,16.616 18.225,17.034 cw(c18.566,17.034) 18.325,17.275 cw(c18.627,16.973) 18.627,17.4 18.669,17.4 ccw(c18.669,17.656) 18.85,17.475 ccw(c18.428,17.897) 19.025,17.897 19.025,19.64 ccw(c18.94,19.64) 19,19.7 ccw(c18.759,19.459) 18.759,19.8 16.625,19.8 16.446,19.8 ccw(c16.446,19.629) 16.325,19.75 ccw(c16.446,19.629) 16.275,19.629 16.275,19.5 16.275,17.58 cw(c13.97,17.58) 15.6,15.95 cw(c15.238,16.312) 15.238,15.8 9.716,15.8 ccw(c9.716,15.459) 9.475,15.7 ccw(c9.897,15.278) 9.3,15.278 9.3,14.883